# Altium PCB ble_lock_2020-10-10 - OLD.PcbDoc
Units mm, origin at the board's own origin, x right, y up, seen from the top; angles counter-clockwise.
Board outline 58 x 27 mm, 2 copper layers (Top Layer, Bottom Layer); 59 components, 46 nets, 184 pads, 219 vias.
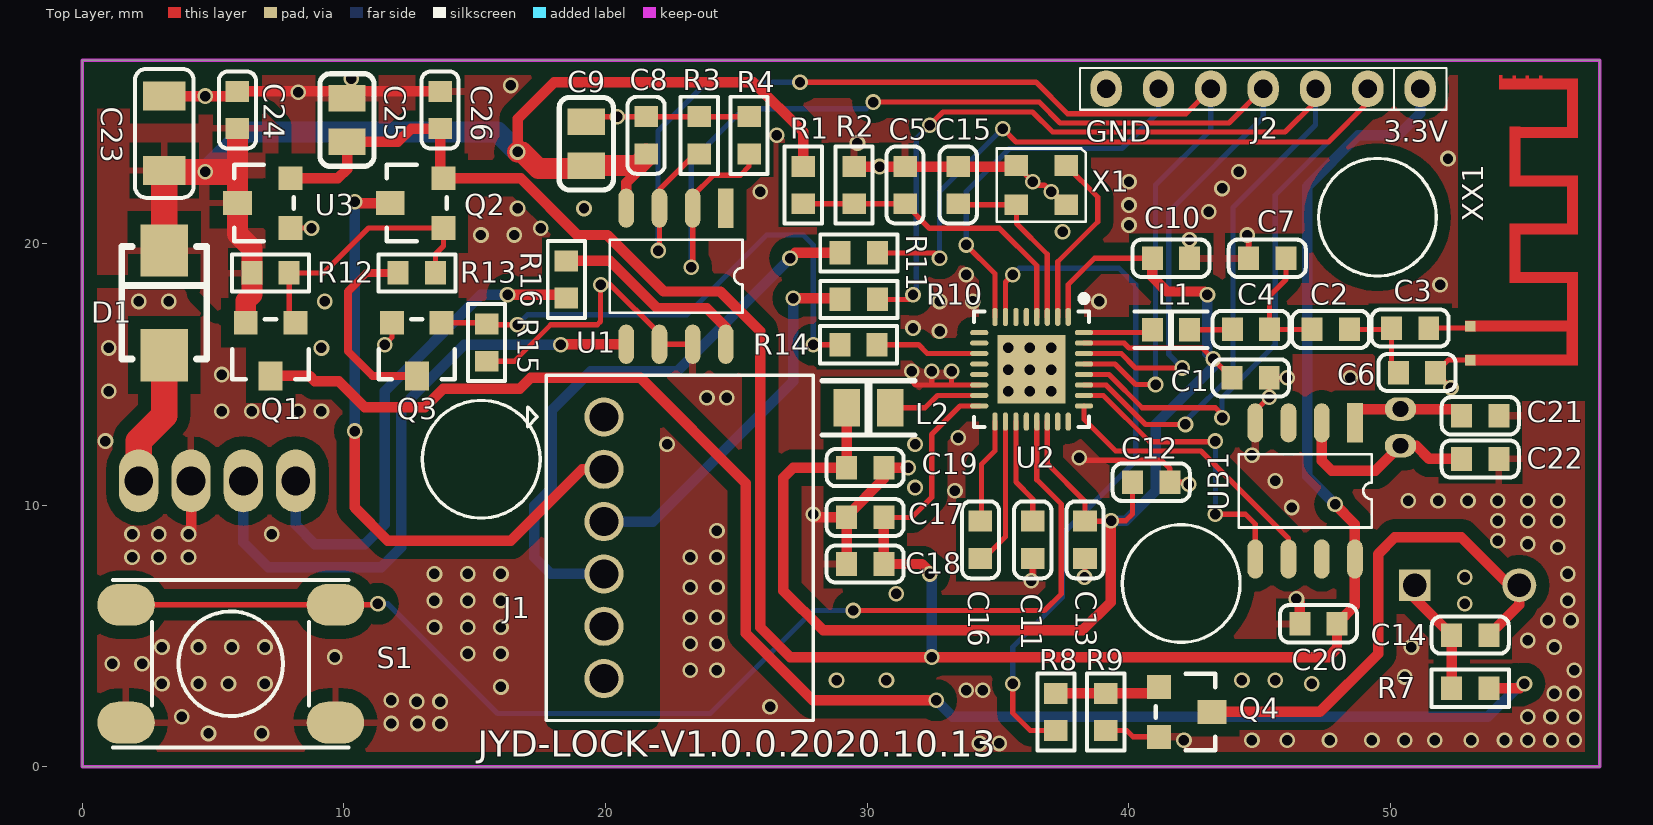
[diagram p0: Top Layer view]
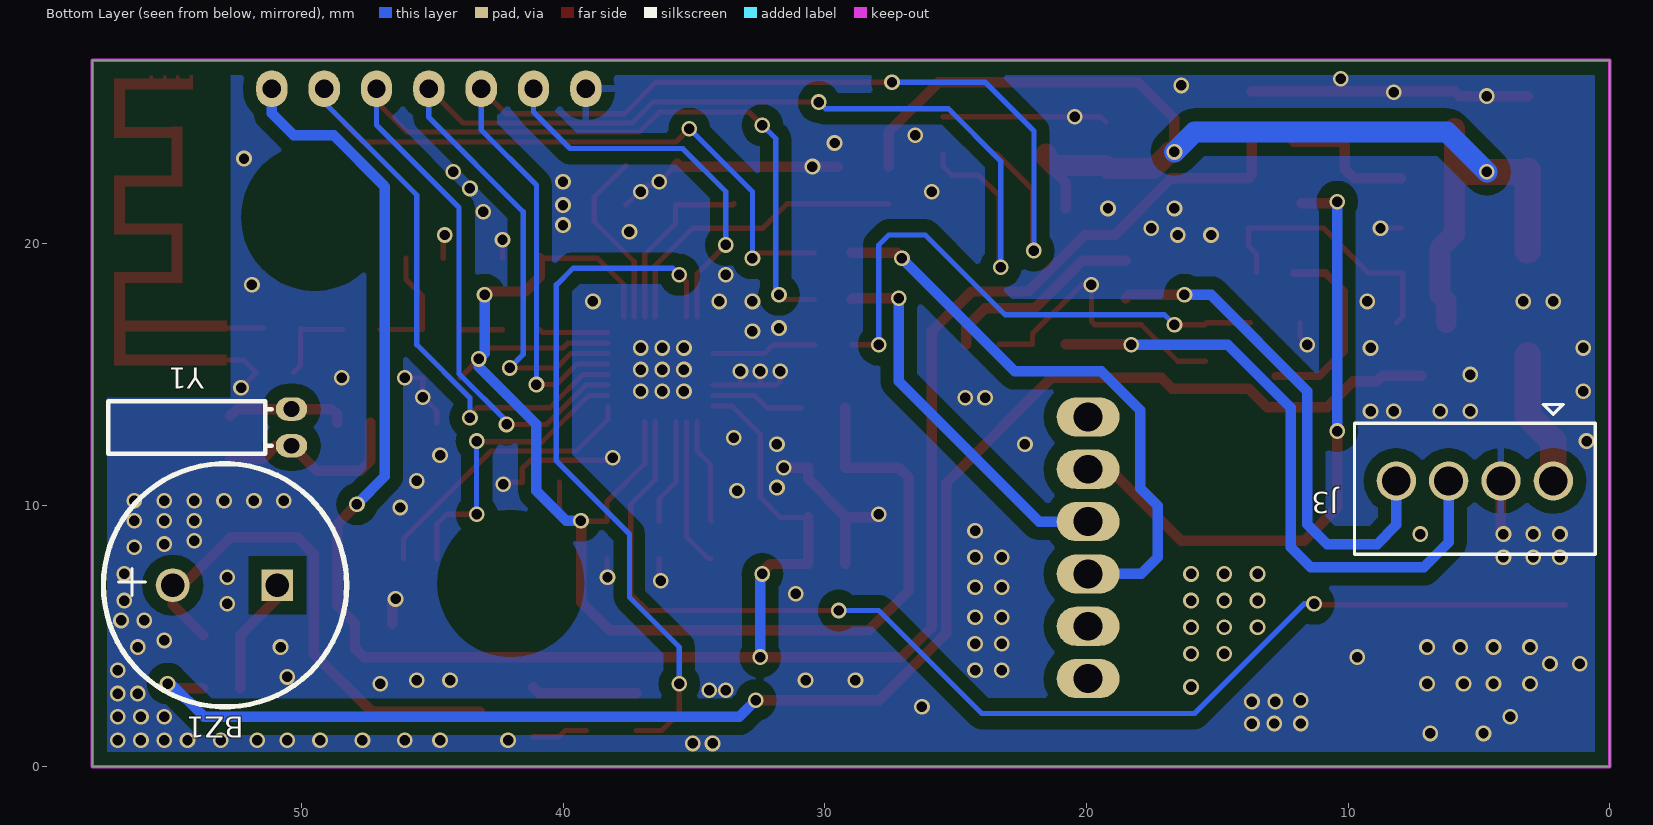
[diagram p1: Bottom Layer view, seen from below]
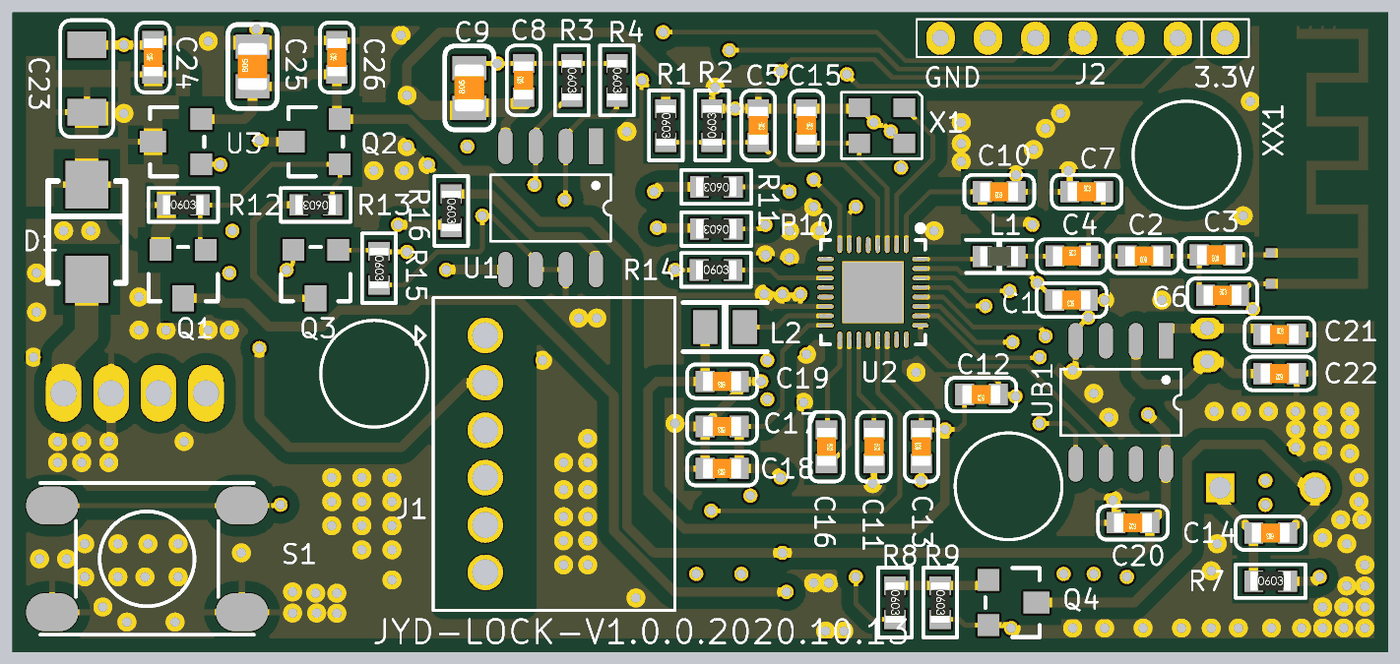
[diagram p2: 3D render of the assembled board from above, using the file's embedded part models]

## Layer stack, top to bottom
Top Layer: signal copper 0.0356
Dielectric: dielectric 0.32, FR-4, Dk 4.8
Bottom Layer: signal copper 0.0356

## Board outline
0,0 58,0 58,27 0,27 0,0

## Design rules (kind name [scope] priority, off if disabled: settings)
Clearance [All] p1 off: gap=0.5
Clearance Clearance_1 [All] p2: gap=0.152
ComponentClearance [All] p1: gap=0 collisioncheckmode=3 verticalgap=0 showdistances=FALSE
HoleToHoleClearance [All] p1: gap=0 allowstackedmicrovias=TRUE
MinimumSolderMaskSliver [All] p1: minsoldermaskwidth=0
PolygonConnect PolygonConnect_1 [IsVia] p1: connectstyle=Direct reliefconductorwidth=0.254 reliefentries=4 polygonreliefangle="90 Angle"
PolygonConnect [All] p2: connectstyle=Relief reliefconductorwidth=0.254 reliefentries=4 polygonreliefangle="90 Angle"
RoutingVias [All] p1: holewidth=0.41 width=0.8 viastyle="Through Hole" minholewidth=0.3 minwidth=0.6 maxholewidth=0.711 maxwidth=1.27
ShortCircuit [All] p1: allowed=TRUE
SilkToSilkClearance [All] p1: silktosilkclearance=0
SilkscreenOverComponentPads [IsPad] p1: minsilkscreentomaskgap=0
SolderMaskExpansion [All] p1: expansion=0.102
Width [All] p1: maxlimit=2.032 minlimit=0.152 preferedwidth=0.254
22 further rules are at their usual default settings.

## Components (designator, comment, footprint, x,y, rotation, side; value= is the part's Value field where it differs from the comment)
BZ1 "BUZZER" BUZZER_D93_L40 52.92,6.934 r0 bottom
C1 "1uF/6.3V" 0603C 44.655,14.859 r180 top
C2 "0R" 0603C 47.713,16.713 r180 top
C3 "0R" 0603C 50.751,16.764 r180 top
C4 "1.5pF" 0603C 44.665,16.713 r0 top
C5 "1nF" 0603C 31.447,22.225 r270 top
C6 "NC" 0603C 51.015,15.062 r0 top
C7 "1pF" 0603C 45.29,19.431 r0 top
C8 "0.1uF" 0603C 21.551,24.13 r90 top
C9 "22uF" 0805C 19.265,23.809 r90 top
C10 "0.1uF" 0603C 41.607,19.431 r180 top
C11 "0.1uF" 0603C 36.325,8.671 r270 top
C12 "1uF" 0603C 40.855,10.871 r180 top
C13 "0.1uF" 0603C 38.324,8.671 r90 top
C14 "10uF/10V" 0603C 53.047,5.029 r180 top
C15 "2.7pF" 0603C 33.479,22.225 r270 top
C16 "0.1uF" 0603C 34.327,8.671 r270 top
C17 "0.1uF" 0603C 29.923,9.525 r180 top
C18 "10uF/6.3V" 0603C 29.923,7.747 r180 top
C19 "10uF/6.3V" 0603C 29.923,11.43 r180 top
C20 "0.1uF" 0603C 47.244,5.461 r180 top
C21 "22pF" 0603C 53.428,13.411 r0 top
C22 "22pF" 0603C 53.428,11.76 r180 top
C23 "10uF/16V" LC-1206_C 3.136,24.206 r90 top
C24 "100nF" 0603C 5.93,25.095 r90 top
C25 "10uF/10V" LC-0805_C 10.121,24.714 r90 top
C26 "100nF" 0603C 13.677,25.095 r90 top
D1 "SS14" LC-SMAF_S1 3.136,17.729 r270 top
J1 "CON6" JC20-6P-H 19.939,7.366 r90 top
J2 "7P" 7P-2.0MM 51.132,25.908 r180 top
J3 "后板端口" JC20-4P-V 2.159,10.922 r180 bottom
L1 "2nH" 0603L 41.607,16.702 r180 top
L2 "4.7uH" 0805L 30.05,13.716 r0 top
Q1 "SI2301" "SOT-23 - GDS" 7.2,15.951 r180 top
Q2 "SI2301" "SOT-23 - GDS" 12.788,21.539 r90 top
Q3 "PMBT3904" "SOT-23 - BCE" 12.788,15.951 r180 top
Q4 "SS8050" SOT-23-3L 42.164,2.093 r270 top
R1 "510K%1" 0603R 27.552,22.225 r270 top
R2 "100K%1" 0603R 29.5,22.225 r90 top
R3 "10K" 0603R 23.583,24.13 r270 top
R4 "10K" 0603R 25.488,24.13 r270 top
R7 "10R" 0603R 53.047,2.997 r0 top
R8 "200R" 0603R 37.211,2.093 r270 top
R9 "10K" 0603R 39.116,2.093 r270 top
R10 "560R" 0603R 29.679,17.856 r180 top
R11 "560R" 0603R 29.679,19.634 r180 top
R12 "100K" LC-0603_R 7.2,18.872 r0 top
R13 "1K" LC-0603_R 12.788,18.872 r180 top
R14 "4.7K" LC-0603_R 29.669,16.129 r0 top
R15 "10K" LC-0603_R 15.455,16.205 r270 top
R16 "3R3" 0603R 18.503,18.618 r270 top
S1 "SW-PB" 6*6H9 5.676,3.937 r180 top
U1 "CP2117" SOP8 22.694,18.745 r270 top
U2 "BK3431Q" QFN32_4*4*0.4 36.283,15.189 r270 top
U3 "HT7533-1" SOT-23-3L 6.946,21.539 r90 top
UB1 "PCF8563" SOP8 46.736,10.541 r270 top
X1 "16MHZ" XTAL3225 36.654,22.225 r180 top
XX1 "TIANX" BT_NAMI_NO 53.047,16.84 r270 top
Y1 "32.768KHZ" 晶振-9 50.38,12.268 r90 bottom

## Footprints (in the part's own frame and the unit in brackets; to place one, negate y for a bottom-side part, rotate by r counter-clockwise, add the part's x,y. Pads: shape width x height; smd on the part's side, far side on the other; paste and mask are expansions set on the pad)
6*6H9 [mm]
  oval 2.2x1.6 smd mask+0.05: 1(-4,2.25) 1(4,2.25) 2(-4,-2.25) 2(4,-2.25)
  silkscreen extent -4.5,-3.2 4.5,3.2
7P-2.0MM [mm]
  oval 1.2x1.4 hole 0.7 mask+0.05: 1(0,0) 2(2,0) 3(4,0) 4(6,0) 5(8,0) 6(10,0) 7(12,0)
  silkscreen extent -1,-0.8 13,0.8
0603C [mm]
  rect 0.8x0.9 smd: 1(-0.711,0) 2(0.711,0)
  silkscreen extent -1.47,-0.71 1.47,0.71, body extent -0.8,-0.4 0.8,0.4, height 0.3
0603L [mm]
  rect 0.8x0.9 smd: 1(-0.711,0) 2(0.711,0)
  silkscreen extent -1.4,-0.7 1.4,0.7, body extent -0.82,-0.41 0.82,0.41, height 0.46
0603R [mm]
  rect 0.8x0.9 smd: 1(-0.711,0) 2(0.711,0)
  silkscreen extent -1.47,-0.71 1.47,0.71, body extent -0.85,-0.4 0.85,0.4, height 0.56
0805C [mil]
  rect 40x56 smd: 1(-33,0) 2(33,0)
  silkscreen extent -70,-41 70,41, body extent -39,-25 39,25, height 30
0805L [mil]
  rect 40x56 smd: 1(-33,0) 2(33,0)
  silkscreen extent -70,-41 70,41
BT_NAMI_NO [mm]
  rect 0.4x0.4 smd: 1(0,0) 2(1.3,0)
  Top Layer region: -9.578,1.22 -9.136,1.22 -9.136,1.107 -9.578,1.107
  Top Layer region: -9.571,2.745 -9.135,2.745 -9.135,2.632 -9.571,2.632
  Top Layer region: -9.573,2.239 -9.136,2.239 -9.136,2.126 -9.573,2.126
  Top Layer region: -9.574,1.732 -9.135,1.732 -9.135,1.619 -9.574,1.619
  Top Layer region: -9.048,1.106 -9.45,1.106 -9.45,4.108 -9.048,4.108
  Top Layer region: -9.45,3.704 -9.45,4.106 -7.201,4.106 -7.201,3.704
  Top Layer region: -7.202,1.51 -7.604,1.51 -7.604,4.106 -7.202,4.106
  Top Layer region: -5.35,1.51 -5.752,1.51 -5.752,4.103 -5.35,4.103
  Top Layer region: -7.609,1.506 -7.609,1.907 -5.359,1.907 -5.359,1.506
  Top Layer region: -5.751,3.704 -5.751,4.106 -3.502,4.106 -3.502,3.704
  Top Layer region: -3.5,1.512 -3.902,1.512 -3.902,4.101 -3.5,4.101
  Top Layer region: -3.899,1.51 -3.899,1.911 -1.65,1.911 -1.65,1.51
  Top Layer region: -0.208,3.695 -0.208,4.11 1.495,4.11 1.495,3.695
  Top Layer region: -1.651,1.512 -2.053,1.512 -2.053,4.101 -1.651,4.101
  Top Layer region: -2.05,3.703 -2.05,4.104 0.199,4.104 0.199,3.703
  Top Layer region: 0.2,-0.197 -0.203,-0.197 -0.203,4.1 0.2,4.1
  Top Layer region: 1.5,-0.18 1.098,-0.18 1.098,4.116 1.5,4.116
BUZZER_D93_L40 [mm]
  rect 1.2x1.2 hole 0.9: 1(-2,0)
  round 1.3 hole 0.9: 2(2,0)
  silkscreen extent -4.65,-4.65 4.65,4.65
JC20-4P-V [mm]
  round 1.5 / inner round 1.5 / far side oval 1.5x2.4 hole 1.1 mask+0.05: 1(0,0) 2(-2,0) 3(-4,0) 4(-6,0)
  silkscreen extent -7.6,-2.8 1.6,2.92
JC20-6P-H [mm]
  round 1.5 / inner round 1.5 / far side oval 1.5x2.4 hole 1.1 mask+0.05: 1(6,0) 2(4,0) 3(2,0) 4(0,0) 5(-2,0) 6(-4,0)
  silkscreen extent -5.6,-8 7.6,2.92
LC-0603_R [mm]
  rect 0.8x0.9 smd: 1(-0.711,0) 2(0.711,0)
  silkscreen extent -1.47,-0.71 1.47,0.71, body extent -0.85,-0.4 0.85,0.4, height 0.56
LC-0805_C [mil]
  rect 40x56 smd: 1(-33,0) 2(33,0)
  silkscreen extent -70,-41 70,41, body extent -39,-25 39,25, height 30
LC-1206_C [mil]
  rect 44x64 smd: 1(-56,0) 2(56,0)
  silkscreen extent -97,-44 97,44
LC-SMAF_S1 [mm]
  rect 2x1.8 smd: 1(2,0) 2(-2,0)
  silkscreen extent -2.15,-1.63 2.15,1.63
QFN32_4*4*0.4 [mm]
  rect 2.6x2.6 smd paste-0.025 mask+0.051: 0(0,0)
  oval 0.7x0.2 smd paste-0.025 mask+0.051: 1(-2,1.4) 2(-2,1) 3(-2,0.6) 4(-2,0.2) 5(-2,-0.2) 6(-2,-0.6) 7(-2,-1) 8(-2,-1.4) 17(2,-1.4) 18(2,-1) 19(2,-0.6) 20(2,-0.2) 21(2,0.2) 22(2,0.6) 23(2,1) 24(2,1.4)
  oval 0.2x0.7 smd paste-0.025 mask+0.051: 9(-1.4,-2) 10(-1,-2) 11(-0.6,-2) 12(-0.2,-2) 13(0.2,-2) 14(0.6,-2) 15(1,-2) 16(1.4,-2) 25(1.4,2) 26(1,2) 27(0.6,2) 28(0.2,2) 29(-0.2,2) 30(-0.6,2) 31(-1,2) 32(-1.4,2)
  silkscreen extent -2.82,-2.2 2.2,2.2
SOP8 [mm]
  rect 1.5x0.6 smd mask+0.05: 1(-2.6,1.905)
  oval 1.5x0.6 smd mask+0.05: 2(-2.6,0.635) 3(-2.6,-0.635) 4(-2.6,-1.905) 5(2.6,-1.905) 6(2.6,-0.635) 7(2.6,0.635) 8(2.6,1.905)
  round 0.4 on Top Overlay mask+0.05: ""(-0.949,1.905)
  silkscreen extent -1.4,-2.54 1.4,2.54
"SOT-23 - BCE" [mil]
  rect 36x36 smd: B(-37.4,-40) E(37.4,-40)
  rect 36x43.31 smd: C(0,40)
  silkscreen extent -57,-45 58,45
"SOT-23 - GDS" [mil]
  rect 36x43.31 smd: D(0,40)
  rect 36x36 smd: G(-37.4,-40) S(37.4,-40)
  silkscreen extent -57,-45 58,45
SOT-23-3L [mil]
  rect 36x36 smd: 1(-37.4,-40) 2(37.4,-40)
  rect 36x43.31 smd: 3(0,40)
  silkscreen extent -57,-45 58,45
XTAL3225 [mm]
  rect 0.9x0.8 smd: 1(-0.95,-0.75) 2(0.95,-0.75) 3(0.95,0.75) 4(-0.95,0.75)
  silkscreen extent -1.7,-1.4 1.7,1.4
晶振-9 [mm]
  oval 0.9x1.2 hole 0.6: 1(0,0) 2(1.4,0)
  rect 0x0 smd: 3(0.635,8)
  silkscreen extent -0.3,0.76 1.7,7

## Part data
BZ1: "Buzzer"
C1 C2 C3 C4 C6 C7 C10 C11 C12 C13 C15 C16 C17 C18 C19: library part Cap, "Capacitor"
C5 C8 C9 C26: library part CAP-NP, "Capacitor, Ceramic"
C14: library part C_0_Dup1
C23 C25: library part CAP-P, "Capacitor, tolerance ±20%"
C24: library part "CAP NP"
D1: library part D
J1: "Con"
J3: library part "Header 4H", "Header, 4-Pin, Right Angle"
L1 L2: "Power Inductor, 4.7uH, 0.7A, 260mR DCR"
Q1 Q2: library part PWRMOSFET_EP_DGS_0
Q4: library part NPN_BJT, "Bipolar Junction Transistor"
R1 R2: library part Res2, "Resistor"
R3 R4: library part Pro71C3.TMP_UnNamed_1
R7 R8 R9 R16: library part R_Dup1
R10 R11 R12 R13 R14 R15: library part R
U1: library part AM24LC02_0
U3: library part XC6206P302M
UB1: library part IC8
XX1: library part T

## Via types
v1: diameter 0.6, hole 0.4, Top Layer to Bottom Layer, 219 vias

## Nets (pads, with @x,y where several pads share a name; then routed paths per layer and width w, separated by ;. In a path a pad name is that pad's centre, name@x,y a point inside that pad or via, vN(x,y) a via of type N, cw(c..) or ccw(c..) an arc to the next point about the centre after c; other vN are vias at no path point)
BAT_ADC: C5.2 R1.2 R2.1 U2.4 | length 11.9
  Top Layer w0.2: R1.2 R2.1 C5.2 32.387,20.574 35.052,20.574 36.483,19.143 U2.4
BEEP: R8.2 U2.7 | length 27
  Top Layer w0.2: U2.7 35.283,18.519 v1(35.56,18.796) ; v1(35.56,3.175) 35.56,2.056 36.234,1.382 R8.2
  Bottom Layer w0.2: v1(35.56,3.175) 35.56,4.572 37.465,6.477 37.465,8.89 40.259,11.684 40.259,18.415 39.624,19.05 35.814,19.05 v1(35.56,18.796)
GND: C1.1 C5.1 C6.2 C7.1 C8.2 C9.2 C10.1 C11.2 C12.1 C13.1 C15.1 C17.2 C18.2 C19.1 C20.2 C21.2 C22.1 C23.2 C24.2 C25.2 C26.2 J2.7 J3.2 Q3.E Q4.2 R2.2 R3.1 R4.1 R9.2 R15.2 S1.1 U1.6 U1.7 U2.14 U3.1 UB1.4 X1.2 X1.4 XX1.2 | length 67.6
  Top Layer w0.2: U3.1 8.748,20.589 v1(8.763,20.574) ; v1(11.557,16.129) 11.838,16.41 Q3.E ; R15.2 16.51,15.494 17.907,16.891 19.685,16.891 19.812,17.018 v1(19.812,18.415) 20.193,18.415 22.059,16.549 U1.6 U1.7 ; C9.2 19.459,24.841 v1(20.447,24.841) C8.2 R3.1 R4.1 ; v1(31.701,15.113) 31.701,14.732 31.844,14.589 32.463,14.589 ; v1(32.463,15.113) 32.463,14.589 ; v1(33.225,15.113) 33.225,14.589 ; U2.14 33.225,14.589 ; X1.2 v1(36.322,22.357) 36.454,22.225 36.781,22.225 v1(37.035,21.971) 37.108,21.971 X1.4 ; v1(36.273,7.112) 36.325,7.164 C11.2 ; v1(38.1,11.811) 38.198,11.713 41.246,11.713 41.566,11.393 C12.1 42.215,10.871 v1(42.291,10.795) ; v1(38.305,7.239) 38.324,7.258 C13.1 ; R9.2 39.917,1.382 40.156,1.143 Q4.2 ; C10.1 v1(42.318,20.142) v1@42.369,20.193 ; v1(44.528,20.32) 44.579,20.269 C7.1 ; UB1.4 44.831,13.589 v1(45.366,14.124) C1.1 v1(46.052,14.859) ; v1(52.31,14.478) C6.2 52.204,15.54 XX1.2 ; 32.463,14.589 33.225,14.589
  Top Layer w0.4: C23.2 v1(4.699,25.628) 5.752,25.628 C24.2 C26.2 ; v1(4.064,8.89) 4.159,8.985 J3.2 ; v1(27.94,9.652) 28.067,9.525 C17.2 ; C18.2 C17.2 ; R2.2 v1(30.473,22.936) C5.1 C15.1 35.665,22.936 X1.2 X1.2@35.638,23.041 ; v1(31.574,11.43) C19.1 30.634,10.998 29.212,9.576 C17.2 ; v1(46.406,6.411) 46.533,6.284 C20.2
  other v1: 34.29,0.889 35.052,0.889 42.105,1.016 44.704,1.016 46.052,1.016 47.671,1.016 49.29,1.016 50.546,1.016 51.689,1.016 53.086,1.016 54.356,1.016 55.245,1.016 56.134,1.016 57.023,1.016 4.826,1.27 6.858,1.27 13.677,1.641 11.811,1.651 12.827,1.651 3.81,1.905 55.245,1.905 56.134,1.905 57.023,1.905 26.289,2.286 12.788,2.489 13.677,2.489 11.811,2.54 56.261,2.794 57.023,2.794 33.782,2.921 34.417,2.921 16.002,3.048 3.048,3.175 4.445,3.175 5.588,3.175 6.985,3.175 46.99,3.175 28.829,3.302 30.734,3.302 44.323,3.302 45.593,3.302 50.546,3.429 23.241,3.683 24.257,3.683 57.023,3.683 1.143,3.937 2.286,3.937 9.652,4.191 14.732,4.318 16.002,4.318 3.048,4.572 4.445,4.572 5.715,4.572 6.985,4.572 50.8,4.572 56.261,4.572 23.241,4.699 24.257,4.699 55.245,4.826 13.462,5.334 14.732,5.334 16.002,5.334 56.007,5.588 56.896,5.588 23.241,5.715 24.257,5.715 52.832,6.223 13.462,6.35 14.732,6.35 16.002,6.35 56.769,6.35 31.115,6.604 23.241,6.858 24.257,6.858 52.832,7.239 13.462,7.366 14.732,7.366 16.002,7.366 56.769,7.366 1.905,8.001 2.921,8.001 4.064,8.001 23.241,8.001 24.257,8.001 56.388,8.382 55.245,8.509 54.102,8.636 1.905,8.89 2.921,8.89 7.239,8.89 24.257,9.017 54.102,9.398 55.245,9.398 56.388,9.398 46.228,9.906 50.673,10.16 51.816,10.16 52.959,10.16 54.102,10.16 55.245,10.16 56.388,10.16 33.352,10.541 31.828,10.668 45.593,10.922 44.704,11.901 22.352,12.319 31.828,12.319 0.889,12.446 33.479,12.573 5.334,13.589 6.477,13.589 8.255,13.589 9.144,13.589 23.876,14.097 24.638,14.097 1.016,14.351 35.384,14.351 36.21,14.351 37.035,14.351 48.465,14.859 5.334,14.986 35.384,15.176 36.21,15.176 37.035,15.176 1.016,16.002 9.144,16.002 35.384,16.002 36.21,16.002 37.035,16.002 32.766,16.637 31.75,16.764 2.159,17.78 3.302,17.78 9.271,17.78 32.766,17.78 34.036,17.78 38.862,17.78 51.894,18.415 33.782,18.796 15.24,20.32 16.51,20.32 37.465,20.447 17.526,20.574 40.005,20.701 43.053,21.209 16.637,21.336 19.177,21.336 40.005,21.463 25.908,21.971 43.561,22.098 40.005,22.352 44.196,22.733 52.197,23.241 29.627,23.836 26.543,24.13 8.255,25.781 16.383,26.035 10.287,26.289
INT_FP: U2.5
IRQ_TSM12: U2.6
M3V3: C17.1 C18.1 C20.1 C25.1 C26.1 J2.1 Q2.S U2.16 U3.2 UB1.8 | length 96.5
  Top Layer w0.2: C17.1 31.701,9.525 32.463,10.287 32.463,12.7 33.552,13.789 U2.16
  Top Layer w0.4: U3.2 9.769,22.489 10.121,22.841 C25.1 12.065,23.876 12.573,24.384 C26.1 13.677,22.616 Q2.S 16.754,22.489 18.923,20.32 20.066,20.32 22.225,18.161 24.384,18.161 25.908,16.637 25.908,5.334 27.051,4.191 v1(32.463,4.191) 47.625,4.191 47.955,4.521 C20.1 48.641,6.147 UB1.8 48.641,9.271 v1(47.879,10.033) ; C17.1 C18.1 32.082,7.747 32.463,7.366 v1(32.385,7.366)
  Bottom Layer w0.4: v1(32.385,7.366) 32.463,7.288 v1(32.463,4.191) ; v1(47.879,10.033) 46.811,11.101 46.811,22.173 48.768,24.13 50.292,24.13 51.132,24.97 J2.1
MOTO+: J3.4 R16.2 | length 19.3
  Top Layer w0.4: v1(16.256,18.034) 18.376,18.034 R16.2
  Bottom Layer w0.4: J3.4 8.159,9.24 8.89,8.509 10.795,8.509 11.557,9.271 11.557,14.351 15.24,18.034 v1(16.256,18.034)
MOTO-: J3.3 U1.5 | length 24
  Top Layer w0.4: v1(18.288,16.129) 18.304,16.145 U1.5
  Bottom Layer w0.4: J3.3 6.159,8.573 7.112,7.62 11.43,7.62 12.192,8.382 12.192,13.716 14.605,16.129 v1(18.288,16.129)
NetBZ1_1: BZ1.1 C14.2 R7.1 | length 4.5
  Top Layer w0.4: BZ1.1 50.92,6.445 C14.2 R7.1
NetBZ1_2: BZ1.2 C14.1 Q4.3 | length 19.9
  Top Layer w0.4: Q4.3 47.305,2.093 49.53,4.318 49.53,8.128 50.165,8.763 52.705,8.763 54.534,6.934 BZ1.2 54.92,6.191 C14.1
NetC2_1: C2.1 C3.2 C6.1 | length 3.4
  Top Layer w0.2: C2.1 49.989,16.713 C3.2 50.04,15.326 C6.1
NetC2_2: C2.2 C4.2 C7.2 | length 4.6
  Top Layer w0.2: C7.2 46.001,18.618 45.376,17.993 C4.2 C2.2
NetC3_1: C3.1 XX1.1 | length 1.6
  Top Layer w0.2: C3.1 52.971,16.764 XX1.1
NetC4_1: C4.1 L1.1 | length 1.6
  Top Layer w0.2: L1.1 43.943,16.702 C4.1
NetC11_1: C11.1 U2.19 | length 4.1
  Top Layer w0.2: U2.19 35.683,10.877 36.325,10.235 C11.1
NetC15_2: C15.2 U2.3 X1.3 | length 7
  Top Layer w0.2: C15.2 33.518,21.475 X1.3 35.704,20.762 36.883,19.583 U2.3
NetC16_1: C16.1 U2.17 | length 4
  Top Layer w0.2: C16.1 34.368,9.423 34.368,11.557 34.883,12.072 U2.17
NetC16_2: C16.2 U2.18 | length 5.7
  Top Layer w0.2: C16.2 34.454,7.96 35.283,8.789 U2.18
NetC21_1: C21.1 UB1.1 Y1.2 | length 4.6
  Top Layer w0.4: UB1.1 48.641,13.462 48.847,13.668 Y1.2 52.46,13.668 C21.1
NetC22_2: C22.2 UB1.2 Y1.1 | length 7.6
  Top Layer w0.4: UB1.2 47.371,11.684 47.752,11.303 49.415,11.303 Y1.1 50.978,12.268 51.486,11.76 C22.2
NetD1_1: D1.1 J3.1 | length 5.2
  Top Layer w1: J3.1 2.159,12.446 3.136,13.423 D1.1
NetJ1_3: J1.3 R10.2 | length 14.4
  Top Layer w0.4: v1(27.178,17.907) 28.917,17.907 R10.2
  Bottom Layer w0.4: J1.3 21.812,9.366 27.178,14.732 v1(27.178,17.907)
NetJ1_4: J1.4 R11.2 | length 22.3
  Top Layer w0.4: v1(27.051,19.431) 27.254,19.634 R11.2
  Bottom Layer w0.4: J1.4 17.907,7.366 17.272,8.001 17.272,9.97 17.939,10.636 17.939,13.621 19.431,15.113 22.733,15.113 v1(27.051,19.431)
NetL1_2: L1.2 U2.32 | length 2.7
  Top Layer w0.2: U2.32 40.783,16.589 L1.2
NetL2_2: L2.2 U2.15 | length 3.6
  Top Layer w0.2: L2.2 32.209,13.716 32.682,14.189 U2.15
NetQ1_G: Q1.G Q2.G R12.2 R13.1 | length 10.5
  Top Layer w0.2: Q1.G 7.911,17.206 R12.2 9.22,18.872 10.937,20.589 Q2.G 13.804,19.9 13.499,19.595 R13.1
NetQ3_B: Q3.B R14.1 R15.1 | length 20.6
  Top Layer w0.2: Q3.B 15.404,16.967 R15.1 15.48,16.891 v1(16.637,16.891) ; v1(27.94,16.129) R14.1
  Bottom Layer w0.2: v1(16.637,16.891) 17.018,17.272 23.114,17.272 26.162,20.32 27.559,20.32 27.94,19.939 v1(27.94,16.129)
NetQ3_C: Q3.C R13.2 | length 7.5
  Top Layer w0.3: R13.2 10.871,18.872 10.16,18.161 10.16,15.875 11.1,14.935 Q3.C
NetQ4_1: Q4.1 R8.1 R9.1 | length 4
  Top Layer w0.4: R8.1 R9.1 40.909,2.804 Q4.1
NetR16_1: R16.1 U1.8 | length 7.8
  Top Layer w0.4: R16.1 20.168,19.329 21.971,17.526 23.876,17.526 24.599,16.803 U1.8
NetU2_2: U2.2 X1.1 | length 6.9
  Top Layer w0.2: U2.2 37.283,19.298 38.813,20.828 38.813,21.766 X1.1
P04/LED_RED: J2.3 R10.1 U2.27 | length 43.8
  Top Layer w0.2: R10.1 31.572,17.856 v1(31.75,18.034) ; v1(32.385,24.511) 32.893,25.019 36.322,25.019 37.089,24.252 45.969,24.252 47.132,25.415 J2.3 ; U2.27 39.132,14.589 40.64,13.081 v1(42.164,13.081)
  Bottom Layer w0.2: v1(31.75,18.034) 31.877,18.161 31.877,24.003 v1(32.385,24.511) ; v1(42.164,13.081) 42.164,13.208 43.976,15.02 43.976,21.37 47.132,24.526 J2.3
P05/LED_GREEN: J2.2 R11.1 U2.28 | length 44.8
  Top Layer w0.2: R11.1 32.563,19.634 v1(32.766,19.431) ; v1(35.179,24.384) 35.687,23.876 47.625,23.876 49.132,25.383 J2.2 ; U2.28 39.24,14.989 40.513,13.716 43.307,13.716 v1@43.624,13.399 ; v1(43.561,13.335) v1@43.624,13.399 ; v1@43.688,13.335 v1@43.624,13.399
  Bottom Layer w0.2: v1(32.766,19.431) 32.766,21.971 v1(35.179,24.384) ; v1(43.561,13.335) 43.561,14.097 45.593,16.129 45.593,21.844 49.132,25.383 J2.2
P06/MOTO1: J2.5 R3.2 U1.3 U2.29 | length 47.1
  Top Layer w0.2: v1(22.01,19.724) 22.059,19.724 U1.3 22.059,22.059 23.419,23.419 R3.2 ; v1(27.432,26.162) 36.449,26.162 37.655,24.956 42.18,24.956 J2.5 ; U2.29 39.475,15.389 40.259,14.605 v1(41.021,14.605)
  Bottom Layer w0.2: v1(22.01,19.724) 22.01,24.296 23.876,26.162 v1(27.432,26.162) ; v1(41.021,14.605) 41.021,22.225 43.132,24.336 J2.5
P07/MOTO0: J2.4 R4.2 U1.2 U2.30 | length 49.9
  Top Layer w0.2: v1(23.28,19.089) 23.329,19.089 U1.2 23.329,21.805 24.13,22.606 25.146,22.606 25.488,22.948 R4.2 ; v1(30.226,25.4) 36.576,25.4 37.372,24.604 43.828,24.604 J2.4 ; U2.30 39.71,15.789 40.259,15.24 v1(42.037,15.24)
  Bottom Layer w0.2: v1(23.28,19.089) 23.28,23.153 25.273,25.146 29.972,25.146 v1(30.226,25.4) ; v1(42.037,15.24) 41.529,15.748 41.529,21.209 45.132,24.812 J2.4
PWR_CTL: R14.2 U2.11 | length 4
  Top Layer w0.2: R14.2 31.955,16.129 32.295,15.789 U2.11
REMOTO: U2.10
RSTN: J2.6 U2.8 | length 14.7
  Top Layer w0.2: v1(33.782,19.939) 34.883,18.838 U2.8
  Bottom Layer w0.2: v1(33.782,19.939) 33.782,21.971 35.433,23.622 39.735,23.622 41.132,25.019 J2.6
RX2/SETKEY: S1.2 U2.21 | length 46.4
  Top Layer w0.2: S1.2@1.676,6.187 9.676,6.187 11.267,6.187 v1(11.303,6.223) ; v1(29.464,5.969) 36.781,5.969 37.416,6.604 37.416,10.033 36.483,10.966 U2.21
  Bottom Layer w0.2: v1(11.303,6.223) 11.684,6.223 15.875,2.032 24.003,2.032 27.94,5.969 v1(29.464,5.969)
SCL: U2.25 UB1.6 | length 11
  Top Layer w0.2: U2.25 38.283,13.279 39.497,12.065 42.76,12.065 46.101,8.724 UB1.6
SDA: U2.26 UB1.5 | length 11.6
  Top Layer w0.2: U2.26 39.024,14.189 40.796,12.417 43.278,12.417 v1(43.307,12.446) ; v1(43.307,9.652) 44.45,9.652 44.831,9.271 UB1.5
  Bottom Layer w0.2: v1(43.307,9.652) v1(43.307,12.446)
TX2: U2.20
V6V: Q1.D R7.2 | length 59.6
  Top Layer w0.4: Q1.D 8.687,14.935 8.89,14.732 9.803,14.732 10.795,13.74 13.098,13.74 13.797,14.439 16.725,14.439 17.145,14.859 21.336,14.859 25.356,10.839 25.356,5.105 27.921,2.54 v1(32.639,2.54) ; R7.2 54.94,2.997 v1(55.118,3.175)
  Bottom Layer w0.4: v1(32.639,2.54) 33.274,1.905 53.721,1.905 54.991,3.175 v1(55.118,3.175)
VBAT: C8.1 C9.1 C23.1 C24.1 D1.2 Q1.S R1.1 R12.1 U1.4 U3.3 | length 49
  Top Layer w0.4: v1(16.637,23.495) 16.637,24.765 18.034,26.162 25.654,26.162 27.552,24.264 R1.1 ; U1.4 20.789,22.313 21.551,23.075 C8.1@21.551,23.297
  Top Layer w0.8: C24.1 U3.3 5.93,20.359 6.489,19.8 R12.1 6.489,18.046 6.25,17.807 Q1.S ; v1(16.637,23.495) 16.811,23.495 17.446,22.86 19.154,22.86 C9.1 21.225,22.971 21.551,23.297 C8.1
  Top Layer w1: D1.2 C23.1 3.187,22.733 v1(4.699,22.733) 5.842,22.733
  Bottom Layer w0.8: v1(4.699,22.733) 6.223,24.257 15.875,24.257 v1(16.637,23.495)
VDD: C1.2 C10.2 C12.2 C13.2 C19.2 L2.1 U2.1 U2.22 U2.31 | length 58.3
  Top Layer w0.2: U2.22 36.883,11.582 38.324,10.141 C13.2 v1@39.311,9.382 ; U2.1 37.683,18.428 38.686,19.431 C10.2 ; U2.31 39.82,16.189 40.009,16 42.803,16 v1(43.22,15.583) C1.2 ; v1(39.321,9.398) 39.878,9.398 40.144,9.664 C12.2
  Top Layer w0.4: L2.1 C19.2 27.178,11.43 26.797,11.049 26.797,6.731 28.321,5.207 38.227,5.207 39.311,6.291 39.311,9.382 39.311,9.388 v1(39.321,9.398) ; C10.2 40.896,18.72 41.455,18.161 42.877,18.161 v1(43.004,18.034)
  Bottom Layer w0.4: v1(39.321,9.398) 39.878,9.398 41.021,10.541 41.021,13.081 43.22,15.28 v1(43.22,15.583) 43.004,15.799 v1(43.004,18.034)
VDD3V3: J1.2 Q2.D | length 24.2
  Top Layer w0.4: v1(10.414,12.827) 10.414,9.906 11.684,8.636 16.383,8.636 19.113,11.366 J1.2 ; v1(10.414,21.59) 10.465,21.539 Q2.D
  Bottom Layer w0.4: v1(10.414,12.827) v1(10.414,21.59)
pads on no net: J1.1 J1.5 J1.6 U1. U1.1 U2.0 U2.9 U2.12 U2.13 U2.23 U2.24 UB1. UB1.3 UB1.7 Y1.3

## Polygon pours and split planes (outlines as drawn)
VBAT on Top Layer "Bottom Layer-No Net" (solid, pour order 4): 0,18.796 3.81,18.796 4.572,18.034 6.223,16.383 6.858,16.383 6.985,16.383 7.493,16.891 7.493,18.542 7.493,24.511 6.985,25.019 6.858,25.146 4.572,25.146 0,25.146 0,18.796
GND on Top Layer "Bottom Layer-No Net" (solid, remove dead copper, pour order 14): 0,27 0,0 58,0 58,14.058 58.039,14.097 57.912,13.97 52.578,13.97 52.578,26.873 52.705,27 0,27
GND on Bottom Layer "Bottom Layer-No Net" (solid, remove dead copper, pour order 10): 0,27 0,0 58,0 58,14.097 52.705,14.097 52.705,27.051 52.654,27 0,27

## Keep-outs
Keep-Out Layer:
  the board outline again, w0.127

## Silkscreen, mask and mechanical layers (free items; w line width, h text height)
Top Overlay:
  circle w0.127: c49.5,21 r2.25
  circle w0.127: c42,7 r2.25
  circle w0.127: c15.25,11.75 r2.25
  text "GND" at 38.354,23.876 h0.8
  text "3.3V" at 49.735,23.876 h0.8
  text "JYD-LOCK-V1.0.0.2020.10.13" at 15.113,0.381 h1
Bottom Overlay:
  lines w0.127: 55.968,7.061 56.222,7.061 56.984,7.061 ; 56.476,6.553 56.476,7.569
Mechanical 1:
  circle w0.127: c49.5,21 r1.2
  circle w0.127: c15.25,11.75 r1.2
  circle w0.127: c41.9,7 r1.2